# Altium PCB CH32V205V-R0.PcbDoc (part 2 of 2)
Units mil, origin at the board's own origin, x right, y up, seen from the top; angles counter-clockwise.
Board outline 3895.03 x 3750.03 mil, 2 copper layers (Top Layer, Bottom Layer); 66 components, 111 nets, 402 pads, 717 vias.
Unrouted connection lines stored in the file: 82.
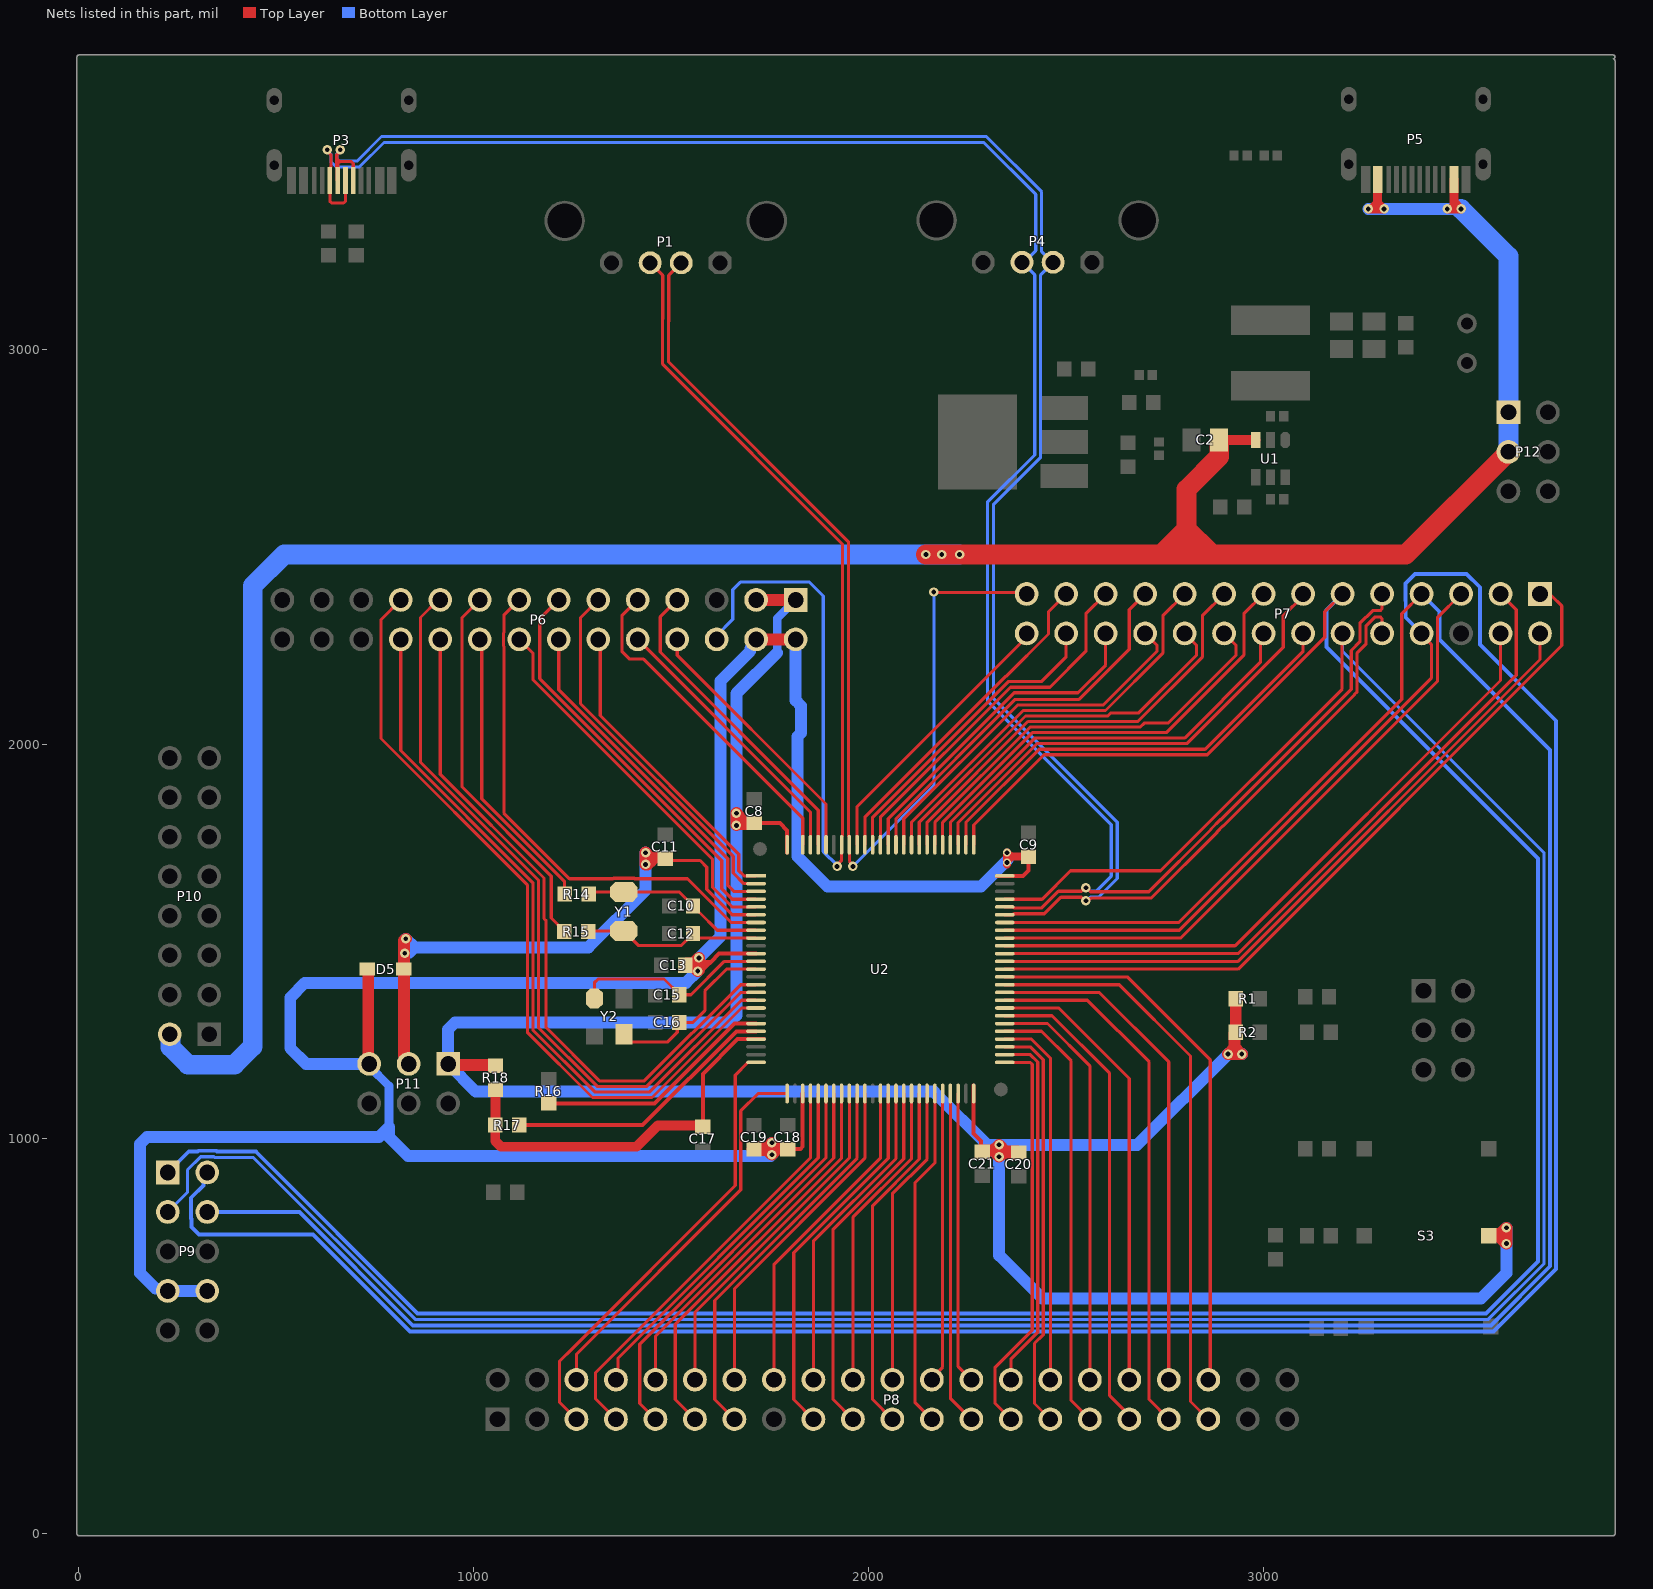
[diagram p2: the nets of this part, all layers, seen from the top]

## Via types
v1: diameter 24, hole 12, Top Layer to Bottom Layer, tented both sides, 571 vias
v2: diameter 20, hole 12, Top Layer to Bottom Layer, tented both sides, 134 vias
v3: diameter 19.68, hole 11.81, Top Layer to Bottom Layer, tented both sides, 12 vias

## Nets (pads, with @x,y where several pads share a name; then routed paths per layer and width w, separated by ;. In a path a pad name is that pad's centre, name@x,y a point inside that pad or via, vN(x,y) a via of type N, cw(c..) or ccw(c..) an arc to the next point about the centre after c; other vN are vias at no path point) (continued)
PA2: P8.5 U2.25 | length 1139.9
  Top Layer w8: P8.5@1260,290 1217,333 1217,437.31 1234.69,455 1235,455 1661.94,881.94 1661.94,1161.45 1693.9,1193.41 1714.4,1193.41 U2.25@1714.72,1193.74
PA3: P8.6 U2.26 | length 989
  Top Layer w8: P8.6@1260,390 1260,455 1675.94,870.94 1675.94,1070.94 1720,1115 U2.26@1793.47,1115
PA4: P8.7 U2.29 | length 1071.9
  Top Layer w8: P8.7@1360,290 1308.24,341.76 1308.24,407.83 1852.52,952.11 U2.29@1852.52,1115
PA5: P8.8 U2.30 | length 937.2
  Top Layer w8: P8.8@1360,390 1365.23,395.23 1365.23,445.02 1872.2,952 U2.30@1872.2,1115
PA6: P8.9 U2.31 | length 1037
  Top Layer w8: P8.9@1460,290 1420,330 1420,479.99 1891.89,951.88 U2.31@1891.89,1115
PA7: P8.10 U2.32 | length 912
  Top Layer w8: P8.10@1460,390 1460,500.2 1911.57,951.77 U2.32@1911.57,1115
PA8: P7.5 U2.67 | length 1611
  Top Layer w8: U2.67@2344.65,1508.7 2790.47,1508.7 3440,2158.23 3440,2320 P7.5@3500,2380
PA9: P7.8 P9.2 U2.68 | length 7418.2
  Top Layer w8: U2.68@2344.65,1528.39 2786.39,1528.39 3425,2167 3425,2252.23 3400,2277.23 P7.8@3400,2280
  Bottom Layer w10: P9.2@325,915 315.43,905.43 315.43,882.43 284,851 284,798.02 285,797.02 285,777 304,758 592.76,758 838.76,512 3582.05,512 3741,670.95 3741,2059 3548,2252 3548,2397 3514,2431 3383,2431 3359,2407 3359,2363.02 3360,2362.02 3360,2320 P7.8@3400,2280
PA10: P7.7 P9.4 U2.69 | length 6944.9
  Top Layer w8: U2.69@2344.65,1548.07 2785.07,1548.07 3350,2113 3350,2330 P7.7@3400,2380
  Bottom Layer w10: P9.4@325,815 558.38,815 845.38,528 3575.43,528 3725,677.57 3725,1985 3445,2265 3445,2335 P7.7@3400,2380
PA11: P3.A7 P3.B7 P4.2 P7.10 U2.70 | length 5568.5
  Top Layer w8: v1(661.89,3505) 661.89,3501.31 652.89,3492.31 652.89,3482.11 ; P3.B7@694.61,3427.24 694.61,3470.31 689.92,3475 660,3475 ; U2.70@2344.65,1567.76 2365.42,1567.76 2367.76,1570.1 2444.7,1570.1 2486.6,1612 2538.67,1612 2545.67,1605 2550,1605 2553.06,1608.06 2560.75,1608.06 2562.69,1610 2715.86,1610 2882.69,1776.83 2882.69,1778.25 2896.75,1792.31 2898.17,1792.31 3230,2124.14 3230,2125.56 3237,2132.56 3237,2230.79 3259,2252.79 3259,2298.4 3282.6,2322 3295.31,2322 3300,2317.31 P7.10@3300,2280 ; 652.89,3482.11 652.89,3461.38 653.33,3460.94 653.33,3429.15 P3.A7@655.24,3427.24 655.24,3470.24 660,3475 ; 652.89,3482.11 660,3475
  Top Layer w11.8: v1@2547.67,1607.33 v1@2550,1605
  Bottom Layer w8: v1@659.89,3505 659.89,3500.67 652.89,3493.67 652.89,3481 657.58,3476.31 704.1,3476.31 766.18,3538.39 2297.82,3538.39 2437.99,3398.23 2437.99,3246.99 2464.98,3220 P4.2@2467.17,3220 2435.3,3188.13 2435.3,2725.83 2315.61,2606.14 2315.61,2115.61 2629.39,1801.82 2629.39,1659.39 2582,1612 2561.33,1612 2554.33,1605 v1@2550,1605
  other v1: 2550,1603
PA12: P3.A6 P3.B6 P4.3 P7.9 U2.71 | length 5557.6
  Top Layer w8: v1(628.89,3505) 628.89,3501.31 637.89,3492.31 637.89,3461.94 637.46,3461.5 637.46,3429.15 P3.B6@635.55,3427.24 635.55,3374.69 640.24,3370 670.23,3370 674.92,3374.69 P3.A6@674.92,3427.24 ; U2.71@2344.65,1587.44 2365.42,1587.44 2367.76,1585.1 2438.48,1585.1 2480.39,1627 2538.67,1627 2545.67,1634 2550,1634 2554.33,1634 2562.33,1626 2709.23,1626 2866.69,1783.46 2866.69,1784.88 2890.12,1808.31 2891.54,1808.31 3222,2138.77 3222,2237 3244,2259 3244,2306.02 3275.98,2338 3295.31,2338 3300,2342.69 P7.9@3300,2380
  Top Layer w11.8: v1@2547.67,1631.67 v1@2550,1634
  Bottom Layer w8: v1@630.89,3505 630.89,3500.67 637.89,3493.67 637.89,3474.79 651.37,3461.31 710.31,3461.31 772.39,3523.39 2291.61,3523.39 2422.99,3392.01 2422.99,3249.69 2393.3,3220 P4.3@2388.43,3220 2420.3,3188.13 2420.3,2732.04 2300.61,2612.35 2300.61,2109.39 2614.39,1795.61 2614.39,1665.61 2575.79,1627 2561.33,1627 2554.33,1634 v1@2550,1634
  other v1: 2550,1636
PA13: P7.12 P9.3 U2.72 | length 6828.6
  Top Layer w8: U2.72@2344.65,1607.13 2439.13,1607.13 2511,1679 2739,1679 3199,2139 3199,2279 P7.12@3200,2280
  Bottom Layer w8: P9.3@225,815 275,865 275,921.57 308.43,955 341.57,955 343.57,953 441.6,953 851.6,543 3569.21,543 3710,683.79 3710,1725 3200,2235 P7.12@3200,2280
PA14: P7.11 P9.1 U2.76 | length 6911.5
  Top Layer w8: U2.76@2265.9,1744.92 2265.9,1794.85 2444.06,1973 2857.8,1973 3155,2270.2 3155,2335 P7.11@3200,2380
  Bottom Layer w10: P9.1@225,915 278,968 300.22,968 302.22,970 347.78,970 349.78,968 447.81,968 857.81,558 3563,558 3695,690 3695,1710.2 3159,2246.2 3159,2339 P7.11@3200,2380
PA15: P7.14 U2.77 | length 1134.8
  Top Layer w8: U2.77@2246.22,1744.92 2246.22,1801.22 2432,1987 2852,1987 3100,2235 P7.14@3100,2280
PB0: P8.13 U2.35 | length 995.1
  Top Layer w8: P8.13@1660,290 1610,340 1610,590.8 1970.63,951.43 U2.35@1970.63,1115
PB1: P8.14 U2.36 | length 861.8
  Top Layer w8: P8.14@1660,390 1660,621 1990.32,951.31 U2.36@1990.32,1115
PB3: P7.26 U2.89 | length 787.1
  Top Layer w8: U2.89@2010,1744.92 2010,1814.8 2353.2,2158 2436.94,2158 2500,2221.06 P7.26@2500,2280
PB4: P7.25 U2.90 | length 846.9
  Top Layer w8: U2.90@1990.32,1744.92 1990.32,1814.91 2347.4,2172 2348.57,2172 2455.18,2278.61 2455.18,2335.18 P7.25@2500,2380
PB5: P7.28 U2.91 | length 712.9
  Top Layer w8: U2.91@1970.63,1744.92 1970.63,1841.69 2400,2271.06 P7.28@2400,2280
PB6: P1.3 P6.6 U2.93 | length 2830.3
  Top Layer w8: P1.3@1446.54,3218.7 1478.46,3186.78 1478.46,3076.67 1478,3076.21 1478,2962 1933.6,2506.4 1933.6,1768.03 1931.26,1765.69 U2.93@1931.26,1744.92 1931.26,1705.59 1920,1694.33 v1(1920,1690)
  Bottom Layer w8: P6.6@1615,2265 1615,2275 1655.82,2315.82 1655.82,2390.82 1675,2410 1850,2410 1885,2375 1885,1727.69 1920,1692.69 v1(1920,1690)
PB7: P1.2 P7.27 U2.92 | length 2752.5
  Top Layer w8: P1.2@1525.28,3218.7 1525.28,3218.51 1493.46,3186.7 1493.46,3070.46 1493,3070 1493,2968.21 1948.6,2512.61 1948.6,2360 1948.6,2290 1948.6,1768.03 1950.95,1765.69 U2.92@1950.95,1744.92 1950.95,1703.38 1960,1694.33 v1(1960,1690) ; v1(2165,2385) 2166.47,2383.53 2396.47,2383.53 P7.27@2400,2380
  Bottom Layer w8: v1(1960,1690) 2165,1895 v1(2165,2385)
PB8: P6.8 U2.95 | length 676.2
  Top Layer w8: P6.8@1515,2265 1515,2225 1891.89,1848.11 U2.95@1891.89,1744.92
PB9: P6.7 U2.96 | length 803.7
  Top Layer w8: P6.7@1515,2365 1472,2322 1472,2233 1872.2,1832.8 U2.96@1872.2,1744.92
PB10: P8.25 U2.47 | length 847
  Top Layer w8: U2.47@2206.85,1115 2206.85,343.15 P8.25@2260,290
PB11: P8.26 U2.48 | length 738.9
  Top Layer w8: U2.48@2226.53,1115 2226.53,423.46 P8.26@2260,390
PB12: P8.27 U2.51 | length 1025.7
  Top Layer w8: U2.51@2344.65,1193.74 2344.84,1193.55 2409.31,1193.55 2414,1188.86 2414,515.77 2320,421.77 2320,330 P8.27@2360,290
PB13: P8.28 U2.52 | length 924
  Top Layer w8: U2.52@2344.65,1213.43 2409.24,1213.43 2428,1194.66 2428,509.97 2360,441.97 P8.28@2360,390
PB14: P8.29 U2.53 | length 1047
  Top Layer w8: U2.53@2344.65,1233.11 2409.35,1233.11 2442,1200.46 2442,504.17 2420,482.17 2420,330 P8.29@2460,290
PB15: P8.30 U2.54 | length 950.2
  Top Layer w8: U2.54@2344.65,1252.8 2412.2,1252.8 2460,1205 P8.30@2460,390
PC0: P6.20 U2.15 | length 1782.6
  Top Layer w8: P6.20@915,2265 915,1923.34 1177.63,1660.71 1177.63,1557.93 1183,1552.56 1183,1282 1318,1147 1432,1147 1675.59,1390.59 U2.15@1714.72,1390.59
PC1: P6.19 U2.16 | length 1942.1
  Top Layer w8: P6.19@915,2365 909.69,2365 865,2320.31 865,1953.54 1163.63,1654.91 1163.63,1281.57 1312.2,1133 1438,1133 1675.91,1370.91 U2.16@1714.72,1370.91
PC2: P6.22 U2.17 | length 1854.1
  Top Layer w8: P6.22@815,2265 815,1983.74 1149.63,1649.11 1149.63,1275.77 1306.4,1119 1445.5,1119 1677.72,1351.22 U2.17@1714.72,1351.22
PC3: P6.21 U2.18 | length 2010.5
  Top Layer w8: P6.21@815,2365 765,2315 765,2013.94 1135.63,1643.31 1135.63,1269.97 1300.6,1105 1451.3,1105 1677.84,1331.54 U2.18@1714.72,1331.54
PC4: P8.11 U2.33 | length 1020.2
  Top Layer w8: P8.11@1560,290 1510,340 1510,530.4 1931.26,951.66 U2.33@1931.26,1115
PC5: P8.12 U2.34 | length 886.9
  Top Layer w8: P8.12@1560,390 1560,560.6 1950.95,951.54 U2.34@1950.95,1115
PC6: P7.1 U2.63 | length 1917.8
  Top Layer w8: U2.63@2344.65,1429.96 2935.56,1429.96 3755,2249.4 3755,2340 3755,2350 3730,2375 3705,2375 P7.1@3700,2380
PC7: P7.2 U2.64 | length 1737.8
  Top Layer w8: U2.64@2344.65,1449.65 2935.44,1449.65 3700,2214.2 P7.2@3700,2280
PC8: P7.3 U2.65 | length 1809.8
  Top Layer w8: U2.65@2344.65,1469.33 2935.33,1469.33 3640,2174 3640,2340 P7.3@3600,2380
PC9: P7.4 U2.66 | length 1652.7
  Top Layer w8: U2.66@2344.65,1489.02 2928.02,1489.02 3600,2161 P7.4@3600,2280
PC10: P7.13 U2.78 | length 1219.2
  Top Layer w8: U2.78@2226.53,1744.92 2226.53,1801.33 2426.2,2001 2805.8,2001 3050,2245.2 3050,2325 3100,2375 P7.13@3100,2380
PC11: P7.16 U2.79 | length 1086
  Top Layer w8: U2.79@2206.85,1744.92 2206.85,1801.45 2420.4,2015 2800,2015 2992,2207 2992,2272 P7.16@3000,2280
PC12: P7.15 U2.80 | length 1170.5
  Top Layer w8: U2.80@2187.16,1744.92 2187.16,1801.56 2414.6,2029 2753.8,2029 2950,2225.2 2950,2330 P7.15@3000,2380
PC13: P6.15 U2.7 | length 1311.2
  Top Layer w8: P6.15@1115,2365 1076,2326 1076,2282.57 1075,2281.57 1075,2248.43 1076,2247.43 1076,1825 1242,1659 1352.36,1659 1353.36,1660 1406.64,1660 1407.64,1659 1541,1659 1651.93,1548.07 U2.7@1714.72,1548.07
PC14: P6.18 R14.1 | length 734.1
  Top Layer w8: P6.18@1015,2265 1020,2260 1020,1861.2 1230,1651.2 R14.1@1230,1620
PC15: P6.17 R15.1 | length 966.1
  Top Layer w8: P6.17@1015,2365 970,2320 970,1891.4 1196,1665.4 1196,1559.35 1229.37,1525.98 R15.1@1229.37,1525
PD0: P7.18 U2.81 | length 1062
  Top Layer w8: U2.81@2167.48,1744.92 2167.48,1801.68 2408.8,2043 2687.6,2043 2697.6,2053 2758,2053 2930,2225 2930,2250 P7.18@2900,2280
PD1: P7.17 U2.82 | length 1110
  Top Layer w8: U2.82@2147.8,1744.92 2147.8,1801.79 2403.01,2057 2681.8,2057 2845,2220.2 2845,2325 P7.17@2900,2380
PD2: P7.20 U2.83 | length 1001.6
  Top Layer w8: U2.83@2128.11,1744.92 2128.11,1801.9 2397.21,2071 2605.6,2071 2613.6,2079 2684,2079 2830,2225 2830,2250 P7.20@2800,2280
PD3: P7.19 U2.84 | length 1043.6
  Top Layer w8: U2.84@2108.43,1744.92 2108.43,1802.02 2391.41,2085 2599.8,2085 2745,2230.2 2745,2325 P7.19@2800,2380
PD4: P7.22 U2.85 | length 940.2
  Top Layer w8: U2.85@2088.74,1744.92 2088.74,1810.74 2377,2099 2594,2099 2730,2235 2730,2250 P7.22@2700,2280
PD5: P7.21 U2.86 | length 991.1
  Top Layer w8: U2.86@2069.05,1744.92 2069.05,1810.85 2371.2,2113 2532.8,2113 2660,2240.2 2660,2340 P7.21@2700,2380
PD6: P7.24 U2.87 | length 857.8
  Top Layer w8: U2.87@2049.37,1744.92 2049.37,1810.97 2368.4,2130 2530,2130 2600,2200 P7.24@2600,2280
PD7: P7.23 U2.88 | length 929.9
  Top Layer w8: U2.88@2029.68,1744.92 2029.68,1814.68 2359,2144 2459,2144 2550,2235 2550,2330 P7.23@2600,2380
PD8: P8.31 U2.55 | length 1126.1
  Top Layer w8: U2.55@2344.65,1272.48 2437.52,1272.48 2512.53,1197.47 2512.53,337.47 P8.31@2560,290
PD9: P8.32 U2.56 | length 1054.7
  Top Layer w8: U2.56@2344.65,1292.17 2452.83,1292.17 2560,1185 P8.32@2560,390
PD10: P8.33 U2.57 | length 1222.5
  Top Layer w8: U2.57@2344.65,1311.85 2464.15,1311.85 2610,1166 2610,350 2660,300 P8.33@2660,290
PD11: P8.34 U2.58 | length 1152.3
  Top Layer w8: U2.58@2344.65,1331.54 2481.46,1331.54 2660,1153 P8.34@2660,390
PD12: P8.35 U2.59 | length 1355.8
  Top Layer w8: U2.59@2344.65,1351.22 2553.78,1351.22 2710,1195 2710,340 P8.35@2760,290
PD13: P8.36 U2.60 | length 1293.2
  Top Layer w8: U2.60@2344.65,1370.91 2584.09,1370.91 2760,1195 P8.36@2760,390
PD14: P8.37 U2.61 | length 1483.8
  Top Layer w8: U2.61@2344.65,1390.59 2634.41,1390.59 2815,1210 2815,335 P8.37@2860,290
PD15: P8.38 U2.62 | length 1419.5
  Top Layer w8: U2.62@2344.65,1410.28 2654.72,1410.28 2865,1200 2865,395 P8.38@2860,390
PE0: P6.10 U2.97 | length 701.3
  Top Layer w8: P6.10@1415,2265 1852.52,1827.48 U2.97@1852.52,1744.92
PE1: P6.9 U2.98 | length 846.8
  Top Layer w8: P6.9@1415,2365 1375,2325 1375,2235 1395,2215 1430,2215 1832.84,1812.16 U2.98@1832.84,1744.92
PE2: P6.12 U2.1 | length 782.3
  Top Layer w8: P6.12@1315,2265 1320,2260 1320,2072.2 1671,1721.2 1671,1679.3 1684.12,1666.18 U2.1@1714.72,1666.18
PE3: P6.11 U2.2 | length 939.3
  Top Layer w8: P6.11@1315,2365 1270,2320 1270,2102.4 1657,1715.4 1657,1673.51 1684.01,1646.5 U2.2@1714.72,1646.5
PE4: P6.14 U2.3 | length 878.3
  Top Layer w8: P6.14@1215,2265 1215,2137.6 1643,1709.6 1643,1642 1658.19,1626.81 U2.3@1714.72,1626.81
PE5: P6.13 U2.4 | length 1039.9
  Top Layer w8: P6.13@1215,2365 1167,2317 1167,2165.8 1628,1704.8 1628,1633.62 1654.49,1607.13 U2.4@1714.72,1607.13
PE6: P6.16 U2.5 | length 961.3
  Top Layer w8: P6.16@1115,2265 1150,2230 1150,2163 1604,1709 1604,1637.82 1654.38,1587.44 U2.5@1714.72,1587.44
PE7: P8.16 U2.38 | length 836.7
  Top Layer w8: P8.16@1760,390 1760,681.4 2029.68,951.09 U2.38@2029.68,1115
PE8: P8.17 U2.39 | length 944.9
  Top Layer w8: P8.17@1860,290 1810,340 1810,711.6 2049.37,950.97 U2.39@2049.37,1115
PE9: P8.18 U2.40 | length 811.6
  Top Layer w8: P8.18@1860,390 1860,741 2069.05,950.05 U2.40@2069.05,1115
PE10: P8.19 U2.41 | length 919.7
  Top Layer w8: P8.19@1960,290 1910,340 1910,771.2 2088.74,949.94 U2.41@2088.74,1115
PE11: P8.20 U2.42 | length 786.5
  Top Layer w8: P8.20@1960,390 1960,801.4 2108.43,949.83 U2.42@2108.43,1115
PE12: P8.21 U2.43 | length 894.6
  Top Layer w8: P8.21@2060,290 2010,340 2010,831 2128.11,949.11 U2.43@2128.11,1115
PE13: P8.22 U2.44 | length 761.4
  Top Layer w8: P8.22@2060,390 2060,861 2147.8,948.79 U2.44@2147.8,1115
PE14: P8.23 U2.45 | length 863.7
  Top Layer w8: P8.23@2160,290 2117,333 2117,888.4 2167.48,938.88 U2.45@2167.48,1115
PE15: P8.24 U2.46 | length 736.3
  Top Layer w8: P8.24@2160,390 2160,395.07 2187.16,422.23 U2.46@2187.16,1115
VBAT: C11.2 D5.1 P11.3 U2.6 | length 1591.8
  Top Layer w8: C11.2@1485,1710 1490,1705 1573.07,1705 1590,1688.07 1590,1632.02 1654.26,1567.76 U2.6@1714.72,1567.76
  Top Layer w30: v1(827.91,1507.09) 822.91,1502.09 D5.1@822.91,1430 822.91,1210.2 835,1198.12 P11.3@835,1190 ; 1450,1705 1440,1695 v1(1435,1695) 1435,1713.31 v1(1435,1725) 1446.69,1713.31 1481.69,1713.31 C11.2@1485,1710
  Bottom Layer w30: v1(1435,1725) v1(1435,1695) 1435,1630 1290,1485 850,1485 ; 850,1485 835,1470 v1(825,1470) 825,1504.17 v1(827.91,1507.09) 850,1485
VBUS_CC: C2.2 P5.A4 P5.B4 P10.2 P12.1 P12.3 U1.3 | length 6630.6
  Top Layer w22: v1(3265,3355) v1@3272.28,3355 ; P5.B4@3289.33,3430 3289.33,3408.74 3288.64,3408.05 3288.64,3371.36 ; v1(3465,3355) 3482.24,3355 ; P5.A4@3482.24,3430 3482.24,3355 ; 3482.76,3372.24 v1(3500,3355) 3482.24,3355 ; v1@3272.28,3355 3288.64,3371.36 ; v1@3272.28,3355 v1(3305,3355) 3288.64,3371.36
  Top Layer w25: C2.2@2887.58,2770 U1.3@2980.1,2770
  Top Layer w50: v1(2145,2480) v1(2185,2480) v1(2230,2480) 2740,2480 ; C2.2@2887.58,2770 2887.58,2727.58 2805,2645 2805,2545 ; P12.3@3620,2740 3360,2480 2865,2480 ; 2740,2480 2810,2480 ; 2740,2480 2805,2545 ; 2805,2545 2865,2485 2865,2480 ; 2805,2545 2805,2485 2810,2480 ; 2810,2480 2865,2480
  Bottom Layer w30: v1(3265,3355) v1(3305,3355) v1(3465,3355) v1(3500,3355)
  Bottom Layer w50: P10.2@230,1265 231.91,1263.09 231.91,1232.38 276.29,1188 394,1188 440,1234 440,2400 520,2480 v1(2145,2480) v1(2185,2480) v1(2230,2480) ; v1(3500,3355) 3620,3235 P12.1@3620,2840 P12.3@3620,2740
VDD: C9.1 C13.1 C18.2 C19.1 D5.2 P6.2 P6.4 P9.7 P9.8 P11.5 U2.11 U2.28 U2.75 | length 7143.9
  Top Layer w10: 1554.56,1442.52 1584.74,1442.52 ; 1556.29,1435.71 1558.67,1438.09 ; v1(1567,1425) 1569.68,1427.68 1579.35,1427.68 1589.76,1438.09 ; U2.11@1714.72,1469.33 1621,1469.33 1600.17,1448.5 ; C18.2@1795,974.37 1826.98,974.37 1832.84,980.23 U2.28@1832.84,1115 ; U2.75@2325,1666.18 U2.75@2344.64,1666.18 2391.18,1666.18 2405,1680 C9.1@2405,1715 ; 1558.67,1438.09 1569.09,1448.5 1570,1448.5 1600.17,1448.5 ; 1558.67,1438.09 1570,1438.09 1589.76,1438.09 ; 1589.76,1438.09 1600.17,1448.5
  Top Layer w20: v2@2350,1695 v2(2350,1700) v2@2350,1703.79 ; C9.1@2405,1715 2360.86,1715 ; v2@2350,1703.79 v2(2350,1725) 2350.86,1725 2360.86,1715 ; v2@2350,1703.79 2355,1708.79 2355,1709.14 2360.86,1715
  Top Layer w30: D5.2@730,1430 732.5,1427.5 732.5,1192.5 P11.5@735,1190 ; v1(1567,1425) 1556.29,1435.71 1538.31,1435.71 1535,1439.02 C13.1@1535,1440 1535,1440.98 1538.31,1444.29 1555.96,1444.29 v1(1570,1458.33) 1570,1448.5 1570,1438.09 1570,1428 v1@1569.68,1427.68 ; C19.1@1705.23,974.63 1708.53,971.33 1743.67,971.33 v1(1755,960) 1760,965 v1@1760,970 ; C19.1@1709.52,977.94 1742.94,977.94 1744.45,979.45 v1(1755,990) 1767.32,977.68 1791.69,977.68 C18.2@1795,974.37 ; P6.4@1715,2265 P6.2@1815,2265
  Bottom Layer w22: P11.5@735,1183.93 785,1133.93 785,1030
  Bottom Layer w30: P9.8@325,615 P9.7@225,615 219.26,620.74 194.26,620.74 155,660 155,987.43 172.57,1005 760,1005 785,1030 785,1005 833,957 1752,957 v1(1755,960) v1(1755,990) ; P11.5@735,1183.93 P11.5@735,1190 575,1190 535,1230 535,1358 572,1395 1537,1395 v1(1567,1425) 1567,1455.33 1625,1513.33 1625,2160 1700,2235 1700,2241.88 1715,2256.88 P6.4@1715,2265 ; P6.2@1815,2265 1815,2110.5 1828.47,2097.03 1828.47,2027.97 1820,2019.5 1820,1715 1896,1639 2284,1639 v2@2352.13,1707.13
VDDA: C17.1 R17.1 R18.2 U2.22 | length 1003.7
  Top Layer w10: C17.1@1580,1036.44 1580,1164.8 1668,1252.8 U2.22@1714.72,1252.8 U2.22@1735,1252.8
  Top Layer w25: R18.2@1055,1124.37 1054.68,1124.05 1054.68,1035.32 R17.1@1054.37,1035 1054.37,994.64 1069.01,980 1412,980 1465.63,1033.63 C17.1@1580,1033.63
VIO: C8.2 C20.1 C21.1 P6.1 P6.3 P11.1 R1.1 R2.1 R18.1 S3.1 U2.50 U2.100 | length 7148
  Top Layer w10: C8.2@1720,1800 1775,1800 1793.47,1781.54 U2.100@1793.47,1744.92 U2.100@1793.47,1725 ; U2.50@2265.9,1135 U2.50@2265.9,1115 2265.9,1014.1 2284.84,995.16 2284.84,970.59 C21.1@2287.71,967.71 ; C20.1@2375,960.63 C20.1@2380,955.63
  Top Layer w30: P11.1@935,1190 937.5,1187.5 R18.1@1051.52,1187.5 ; v1@1665,1795 v1(1665,1825) 1689.19,1800.81 1689.19,1796.69 ; v1@1665,1796 v1@1671.69,1802.69 ; v1@1671.69,1796.69 1689.19,1796.69 ; C8.2@1710,1800 1706.69,1796.69 1689.19,1796.69 ; P6.3@1715,2365 P6.1@1815,2365 ; C21.1@2287.71,967.71 2291.02,971.02 2316.02,971.02 v1(2330,985) ; v1@2325,960 v1(2330,955) ; R1.1@2930,1355 2929.69,1354.68 2929.69,1270.32 R2.1@2929.37,1270 2926.57,1267.2 2926.57,1231.57 ; v1(2945,1215) v1@2943.13,1215 ; S3.1@3569.96,755 3574.65,759.69 3599.69,759.69 v1(3615,775) v1(3615,735) 3600,750 ; v1(2330,955) 2337.32,962.32 2376.69,962.32 C20.1@2380,965.63 2376.69,968.94 2346.06,968.94 v1(2330,985) ; v1(2330,955) v1(2330,985) ; 2926.57,1231.57 v1@2943.13,1215 ; 2926.57,1231.57 v1(2910,1215) v1@2943.13,1215
  Bottom Layer w22: 1768,2231 1768,2318 P6.1@1815,2365
  Bottom Layer w30: 1768,2231 1665,2128 v1(1665,1825) 1665,1780 1665,1312.57 1647.43,1295 952.57,1295 935,1277.43 P11.1@935,1190 1005,1120 2165,1120 2302.5,982.5 ; v1(2945,1215) v1(2910,1215) 2680,985 2360,985 ; v1(3615,775) v1(3615,735) 3615,660 3551,596 2439,596 2330,705 v1(2330,955) ; 2302.5,982.5 v1(2330,955) ; 2302.5,982.5 2305,985 v1(2330,985) ; v1(2330,955) v1(2330,985) ; v1(2330,955) 2360,985 ; v1(2330,985) 2360,985
  other v1: 1665,1794
VREF+: R17.2 U2.21 | length 698.1
  Top Layer w10: R17.2@1115,1035 1427.57,1035 1665.05,1272.48 U2.21@1714.72,1272.48
VREF-: R16.2 U2.20 | length 608.5
  Top Layer w10: R16.2@1190,1090 1457.52,1090 1659.68,1292.17 U2.20@1714.72,1292.17
X32KI: C10.2 R14.2 U2.8 Y1.1 | length 475.1
  Top Layer w8: R14.2@1290.63,1620 1295.63,1625 Y1.1@1380,1625 Y1.1@1385.77,1625 ; Y1.1@1385.77,1619.23 Y1.1@1385.77,1625 ; C10.2@1545,1589.02 C10.2@1545,1590.98 ; U2.8@1714.72,1528.39 1616.61,1528.39 1570.29,1574.71 1569.31,1574.71 1555,1589.02 C10.2@1555,1590 1555,1590.98 1520.98,1625 Y1.1@1385.77,1625
X32KO: C12.2 R15.2 U2.9 Y1.2 | length 467.9
  Top Layer w8: R15.2@1290,1525 1291.57,1526.57 Y1.2@1380,1526.57 1416.57,1490 1525.98,1490 1550.33,1514.35 C12.2@1550.65,1514.35 ; C12.2@1545,1519.02 1545,1520 C12.2@1550.65,1514.35 ; C12.2@1555,1520 1566.3,1508.7 U2.9@1714.72,1508.7 ; C12.2@1556.3,1508.7 C12.2@1550.65,1514.35
XI: C15.2 U2.12 Y2.1 | length 505.6
  Top Layer w8: Y2.1@1305.2,1355.55 1305.2,1395.51 1314.69,1405 1481.61,1405 1520.63,1365.98 C15.2@1520.63,1365 1550,1365 1634.65,1449.65 U2.12@1714.72,1449.65
XO: C16.2 U2.13 Y2.3 | length 461.6
  Top Layer w8: Y2.3@1380,1265 1380,1262.65 1397.65,1245 1490,1245 1515,1270 1515,1289.37 C16.2@1520.63,1295 1555,1295 1585,1325 1585,1375 1639.96,1429.96 U2.13@1714.72,1429.96
pads on no net: P3.A5 P3.B5 P5.A6 P5.A7 P5.A8 P5.B6 P5.B7 P5.B8 U2.0 U4.

## Polygon pours and split planes (outlines as drawn)
GND on Bottom Layer "GND_L02_P002" (solid, remove dead copper, pour order 2): 0,0 3885,0 3885,25 3885,3740 0,3740
GND on Top Layer "GND_L01_P001" (solid, remove dead copper, pour order 1): 0,0 3885,0 3885,50 3885,3740 0,3740

## Keep-outs
Keep-Out Layer:
  lines w10: 0,0 0,3740 3805,3740 3885,3740 3885,0 75,0 0,0

## Other copper
Top Layer:
  rectangle net GND: 3630,3395 3870,3720
  rectangle net GND: 13.25,3401.74 253.25,3726.74
  region net VBUS_CC: 2862.78,2777.78 2862.78,2807.78 2867.78,2812.78 2987.22,2812.78 2992.78,2807.22 2992.78,2727.78 2987.78,2722.78 2872.78,2722.78 2862.78,2732.78
  region net NetC1_1: 2900,2950 2915,2965 3120,2965 3135,2950 3135,2865 3125,2855 3040,2855 3030,2845 3030,2740 3025,2735 3005,2735 3000,2740 3000,2845 2990,2855 2910,2855 2900,2865
  region net 5V: 2865,3175 2865,3055 2890,3030 2900,3030 3575,3030 3605,3060 3605,3175 3560,3220 2910,3220

## Silkscreen, mask and mechanical layers (free items; w line width, h text height)
Top Overlay:
  text "5V" at 3790.84,2827 h35
  text "VBUS_CC" at 3318.37,2817.83 h35
  text "5V" at 3785.84,2722 h35
  text "VBUS_CC" at 3323.37,2712.83 h35
  text "GND" at 3458.35,2617 h35
  text "GND" at 3778.35,2617 h35
  text "PC12" at 2986,2563.16 h35 r270
  text "PC10" at 3086,2563.16 h35 r270
  text "PA14" at 3186,2563.16 h35 r270
  text "PA12" at 3286,2563.16 h35 r270
  text "PA10" at 3386,2563.16 h35 r270
  text "PC15" at 996,2549 h35 r270
  text "PC13" at 1096,2549 h35 r270
  text "PB7" at 2386,2539 h35 r270
  text "PB4" at 2481,2534 h35 r270
  text "PD7" at 2591,2534 h35 r270
  text "PD5" at 2686,2534 h35 r270
  text "PD3" at 2786,2534 h35 r270
  text "PA8" at 3486,2534 h35 r270
  text "PC8" at 3581,2534 h35 r270
  text "PC6" at 3681,2534 h35 r270
  text "PD1" at 2886,2522.34 h35 r270
  text "GND" at 501,2519.84 h35 r270
  text "GND" at 596,2519.84 h35 r270
  text "CC2" at 701,2519.84 h35 r270
  text "PC3" at 796,2519.84 h35 r270
  text "PE5" at 1201,2519.84 h35 r270
  text "PE3" at 1296,2519.84 h35 r270
  text "PB9" at 1491,2519.84 h35 r270
  text "GND" at 1596,2519.84 h35 r270
  text "VIO" at 1691,2514.01 h35 r270
  text "VIO" at 1796,2514.01 h35 r270
  text "PC1" at 901,2508.18 h35 r270
  text "PE1" at 1401,2508.18 h35 r270
  text "PB5" at 2381,2214 h35 r270
  text "PB3" at 2481,2214 h35 r270
  text "PD6" at 2586,2214 h35 r270
  text "PD4" at 2681,2214 h35 r270
  text "PD2" at 2786,2214 h35 r270
  text "PD0" at 2886,2214 h35 r270
  text "PC11" at 2981,2214 h35 r270
  text "PA15" at 3086,2214 h35 r270
  text "PA13" at 3186,2214 h35 r270
  text "PA11" at 3281,2214 h35 r270
  text "PA9" at 3381,2214 h35 r270
  text "GND" at 3486,2214 h35 r270
  text "PC9" at 3586,2214 h35 r270
  text "PC7" at 3686,2214 h35 r270
  text "GND" at 501,2194 h35 r270
  text "GND" at 606,2194 h35 r270
  text "CC1" at 696,2194 h35 r270
  text "PC2" at 801,2194 h35 r270
  text "PC0" at 896,2194 h35 r270
  text "PC14" at 996,2194 h35 r270
  text "PE6" at 1096,2194 h35 r270
  text "PE4" at 1196,2194 h35 r270
  text "PE2" at 1296,2194 h35 r270
  text "PE0" at 1396,2194 h35 r270
  text "PB8" at 1501,2194 h35 r270
  text "VDD" at 1696,2194 h35 r270
  text "VDD" at 1801,2194 h35 r270
  text "PB6" at 1596,2189 h35 r270
  text "3V3" at 76,1951 h35
  text "GND" at 396,1951 h35
  text "3V3" at 71,1851 h35
  text "GND" at 396,1851 h35
  text "3V3" at 76,1751 h35
  text "GND" at 401,1746 h35
  text "GND" at 66,1651 h35
  text "GND" at 396,1651 h35
  text "GND" at 71,1556 h35
  text "GND" at 396,1551 h35
  text "5V" at 106,1446 h35
  text "GND" at 396,1446 h35
  text "VBAT" at 816,1379 h35 r270
  text "GND" at 3576,1366 h35
  text "LED1" at 3226,1356 h35
  text "GND" at 396,1351 h35
  text "VDD" at 721,1349 h35 r270
  text "5V" at 101,1346 h35
  text "VIO" at 921,1344 h35 r270
  text "GND" at 3576,1266 h35
  text "VBUS" at 36,1261 h35
  text "LED2" at 3216,1261 h35
  text "GND" at 396,1246 h35
  text "_CC" at 46,1201.83 h35
  text "KEY" at 3241,1156 h35
  text "GND" at 3571,1151 h35
  text "3V3" at 711,1014 h35 r270
  text "3V3" at 816,1014 h35 r270
  text "3V3" at 921,1014 h35 r270
  text "PA14" at 41,906 h35
  text "PA9" at 391,896 h35
  text "KEY" at 3371,851 h35
  text "PA13" at 41,801 h35
  text "PA10" at 391,796 h35
  text "GND" at 391,701 h35
  text "GND" at 70.16,696 h35
  text "Download" at 3286,631 h35
  text "BOOT1" at 1146,603.16 h35 r270
  text "VDD" at 70.16,596 h35
  text "VDD" at 391,591 h35
  text "PE13" at 2041,574 h35 r270
  text "PE15" at 2146,574 h35 r270
  text "PB13" at 2346,574 h35 r270
  text "PB15" at 2446,574 h35 r270
  text "PD13" at 2741,574 h35 r270
  text "PD15" at 2851,574 h35 r270
  text "PB11" at 2246,562.34 h35 r270
  text "PD11" at 2641,562.34 h35 r270
  text "PE11" at 1946,559 h35 r270
  text "GND" at 1041,544.84 h35 r270
  text "PA3" at 1246,544.84 h35 r270
  text "PA5" at 1346,544.84 h35 r270
  text "PC5" at 1541,544.84 h35 r270
  text "PE9" at 1841,544.84 h35 r270
  text "PD9" at 2541,544.84 h35 r270
  text "GND" at 2941,544.84 h35 r270
  text "GND" at 3046,544.84 h35 r270
  text "PA7" at 1441,544 h35 r270
  text "PE7" at 1741,544 h35 r270
  text "PB1" at 1641,533.18 h35 r270
  text "5V" at 105.15,496 h35
  text "5V" at 391,496 h35
  text "RST" at 3376,396 h35
  text "GND" at 1041,224 h35 r270
  text "BOOT0" at 1146,224 h35 r270
  text "PA2" at 1246,224 h35 r270
  text "PA4" at 1341,224 h35 r270
  text "PA6" at 1441,224 h35 r270
  text "PC4" at 1541,224 h35 r270
  text "PB0" at 1641,224 h35 r270
  text "BOOT1" at 1746,224 h35 r270
  text "PE8" at 1841,224 h35 r270
  text "PE10" at 1941,224 h35 r270
  text "PE12" at 2041,224 h35 r270
  text "PE14" at 2141,224 h35 r270
  text "PB10" at 2236,224 h35 r270
  text "PB12" at 2341,224 h35 r270
  text "PB14" at 2441,224 h35 r270
  text "PD8" at 2541,224 h35 r270
  text "PD10" at 2641,224 h35 r270
  text "PD12" at 2746,224 h35 r270
  text "PD14" at 2846,224 h35 r270
  text "GND" at 2946,224 h35 r270
  text "GND" at 3051,219 h35 r270
  text "CH32V205V-R0-1v2" at 113,173 h45
Mechanical 1:
  lines w10: 0,0 3885,0 3885,3730 3885,3740 0,3740 0,0

## Text inside footprints (layer, text, board x,y; h text height)
D1: Top Overlay "+" at 2621.92,2854.01 h40 r90
D2: Top Overlay "+" at 3066.92,1349.01 h40 r90
D3: Top Overlay "+" at 3071.92,1259.01 h40 r90
P1: Top Overlay "D-" at 1563.7,3338.7 h40 r180; Top Overlay "D+" at 1473.7,3338.7 h40 r180; Top Overlay "V" at 1643.7,3338.7 h40 r180; Top Overlay "G" at 1363.7,3338.7 h40 r180
P4: Top Overlay "D+" at 2415.59,3340 h40 r180; Top Overlay "D-" at 2500,3340 h40 r180; Top Overlay "V" at 2585.59,3340 h40 r180; Top Overlay "G" at 2305.59,3340 h40 r180